# Altium PCB PCB1.PcbDoc
Units mil, origin at the board's own origin, x right, y up, seen from the top; angles counter-clockwise.
Board outline 2362.2 x 1574.8 mil, 2 copper layers (Top Layer, Bottom Layer); 33 components, 23 nets, 119 pads, 10 vias.
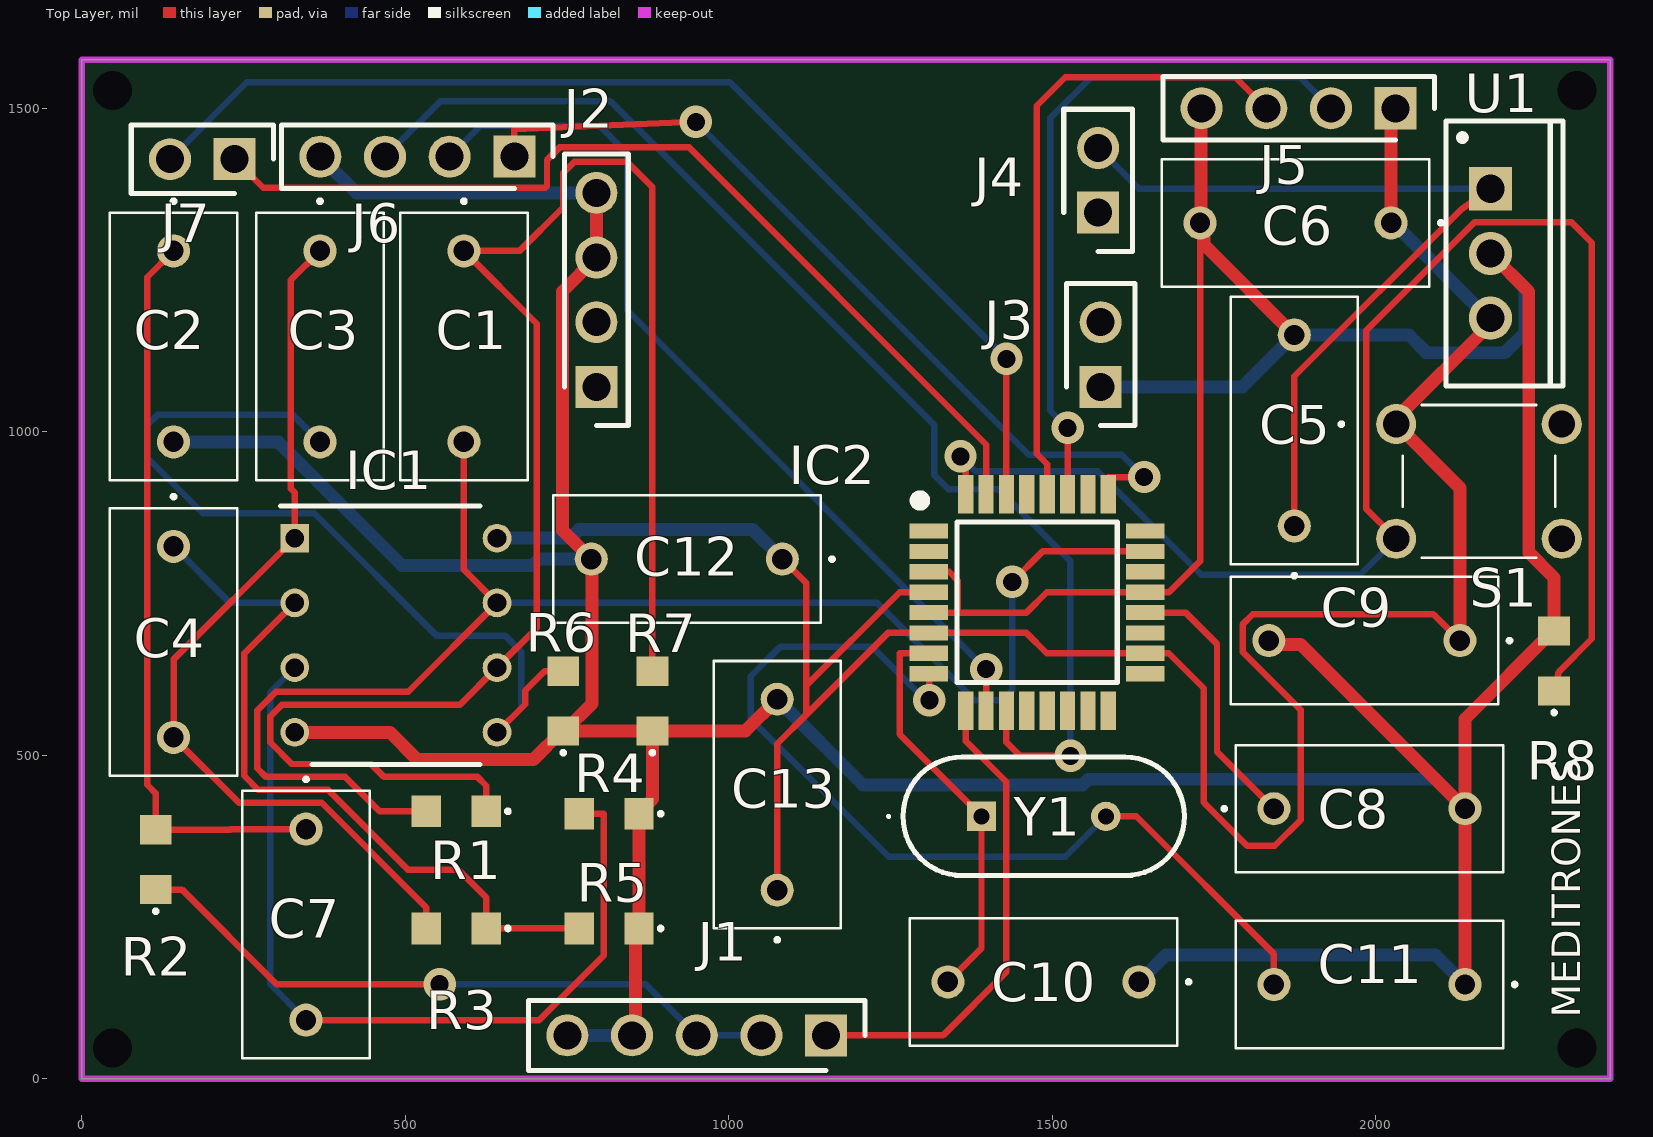
[diagram p0: Top Layer view]
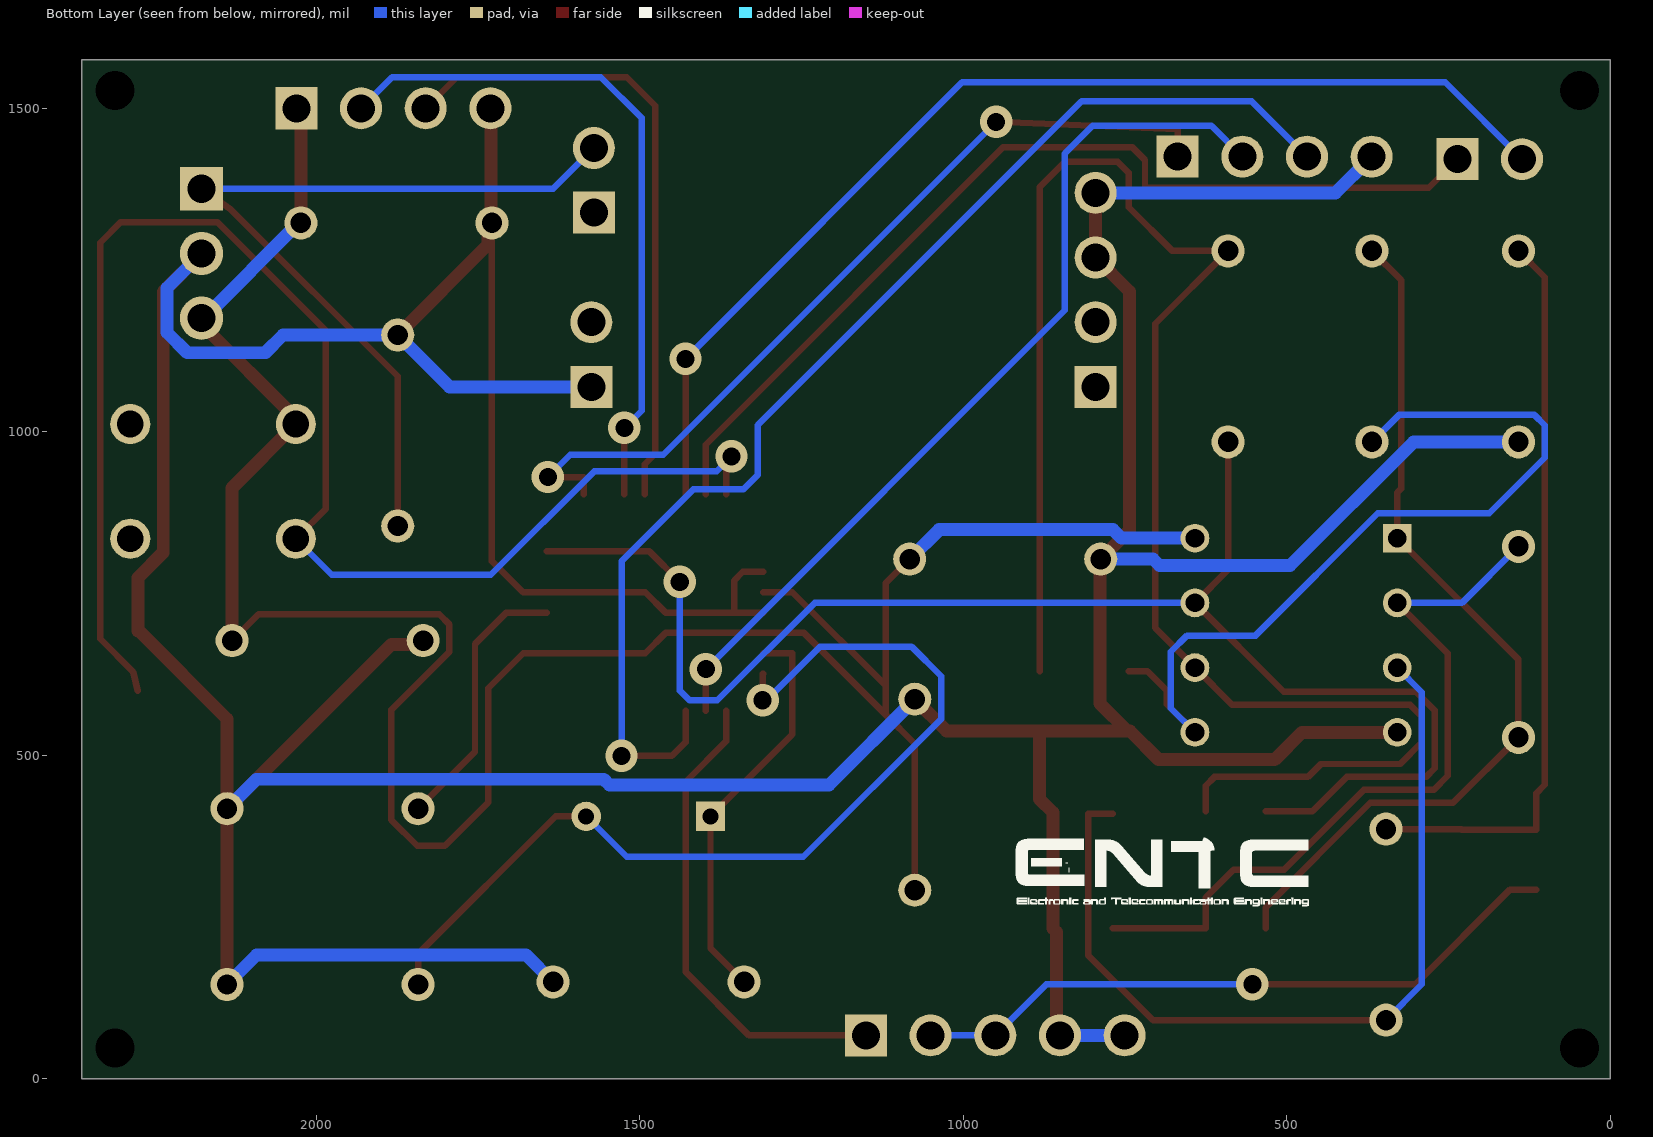
[diagram p1: Bottom Layer view, seen from below]
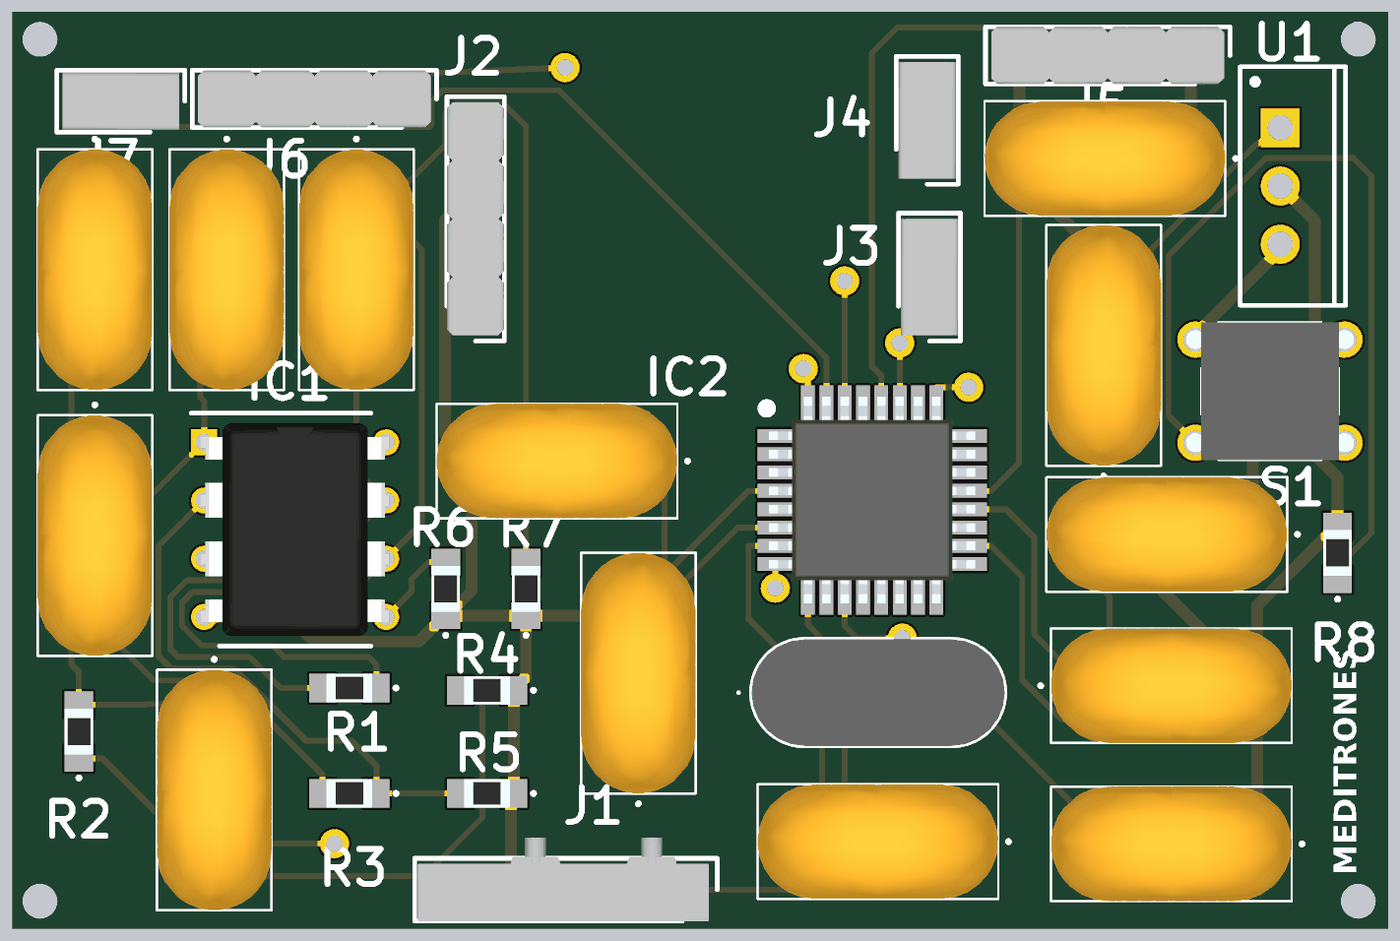
[diagram p2: 3D render of the assembled board from above, using the file's embedded part models]

## Layer stack, top to bottom
Top Solder: solder mask 0.4, Solder Resist, Dk 3.5
Top Layer: signal copper 1.4
Dielectric 1: dielectric 12.6, FR-4, Dk 4.8
Bottom Layer: signal copper 1.4
Bottom Solder: solder mask 0.4, Solder Resist, Dk 3.5

## Board outline
0,0 0,1574.8 2362.2,1574.8 2362.2,0

## Design rules (kind name [scope] priority, off if disabled: settings)
Clearance Clearance_1 [OnMid vs OnMid] p1: gap=10 ignorepadtopadclearanceinfootprint=TRUE sourcerule=37 cellrowname=All cellrowtype=0 cellcolname=All cellcoltype=0 innerlayers=TRUE
Clearance Clearance_2 [(ExistsOnLayer('Top Layer') Or ExistsOnLayer('Bottom Layer')) vs (ExistsOnLayer('Top Layer') Or ExistsOnLayer('Bottom Layer'))] p2: gap=10 ignorepadtopadclearanceinfootprint=TRUE sourcerule=37 cellrowname=All cellrowtype=0 cellcolname=All cellcoltype=0 outerlayers=TRUE
Clearance [All] p3: gap=10 ignorepadtopadclearanceinfootprint=TRUE ismatrix=TRUE
PolygonConnect [All] p1: connectstyle=Relief reliefconductorwidth=10 reliefentries=4 polygonreliefangle="90 Angle" airgapwidth=10
RoutingVias [All] p1: holewidth=28 width=50 viastyle="Through Hole" minholewidth=28 minwidth=50 maxholewidth=28 maxwidth=50
SolderMaskExpansion [All] p1: expansion=4 istentingtop=FALSE
Width MaxMinWidth_5 [All] p1: maxlimit=20 minlimit=10 preferedwidth=20 minimp=50.000000 maximp=50.000000 favimp=50.000000
Width [All] p2: maxlimit=10 minlimit=10 preferedwidth=10
30 further rules are at their usual default settings.

## Components (designator, comment, footprint, x,y, rotation, side; value= is the part's Value field where it differs from the comment)
C1 "0.1mF Cap" VY2332M41Y5US63V7 590.55,1279.53 r270 top
C2 "100nF Cap" VY2332M41Y5US63V7 141.73,1279.53 r270 top
C3 "1mF Cap" VY2332M41Y5US63V7 368.11,1279.53 r270 top
C4 "0.1mF Cap" VY2332M41Y5US63V7 141.73,822.83 r270 top
C5 "0.22mF Cap" VY2332M41Y5US63V7 1874.02,854.33 r90 top
C6 "0.1mF Cap" VY2332M41Y5US63V7 2023.62,1322.83 r180 top
C7 "1mF Cap" VY2332M41Y5US63V7 346.46,385.83 r270 top
C8 "100nF Cap" VY2332M41Y5US63V7 1842.52,417.32 r0 top
C9 "100nF Cap" VY2332M41Y5US63V7 2129.92,677.17 r180 top
C10 "22PF Cap" VY2332M41Y5US63V7 1633.86,149.61 r180 top
C11 "22PF Cap" VY2332M41Y5US63V7 2137.8,145.67 r180 top
C12 "10mF Cap" VY2332M41Y5US63V7 1082.68,803.15 r180 top
C13 "10mF Cap" VY2332M41Y5US63V7 1074.8,291.34 r90 top
IC1 "LM358PE4 OpAmp" DIP794W53P254L959H508Q8N 485.43,685.43 r0 top
IC2 "ATMEGA328P-AU" QFP80P900X900X120-32N 1476.38,736.22 r0 top
J1 "5 male headers" HDRV5W63P0X254_1X5_1270X254X970P 1150.39,66.93 r180 top
J2 "4 male headers" HDRV4W63P0X254_1X4_1016X250X950P 795.28,1069.29 r90 top
J3 "2 male headers" HDRV2W63P0X254_1X2_508X250X970P 1574.8,1069.29 r90 top
J4 "2 male headers" HDRV2W63P0X254_1X2_508X250X970P 1570.87,1338.58 r90 top
J5 "4 male headers" HDRV4W63P0X254_1X4_1016X250X950P 2030.71,1500 r180 top
J6 "4 male headers" HDRV4W63P0X254_1X4_1016X250X950P 668.5,1425.2 r180 top
J7 "2 male headers" HDRV2W63P0X254_1X2_508X250X970P 236.22,1421.26 r180 top
R1 "680k s R" ERJUP6 578.74,413.39 r180 top
R2 "1k s R" ERJUP6 114.17,338.58 r90 top
R3 "680k s R" ERJUP6 578.74,232.28 r180 top
R4 "68k s R" ERJUP6 814.96,409.45 r180 top
R5 "6.8k s R" ERJUP6 814.96,232.28 r180 top
R6 "68k s R" ERJUP6 744.09,583.66 r90 top
R7 "6.8k s R" ERJUP6 881.89,583.66 r90 top
R8 "10k s R" ERJUP6 2275.59,645.67 r90 top
S1 "MJTP1230A" MJTP1230A 2031.49,1011.81 r0 top
U1 "L7805CV" TO220 2177.17,1275.59 r270 top
Y1 "Ocillator" XT9S20ANA8M 1390.55,405.51 r0 top

## Footprints (in the part's own frame and the unit in brackets; to place one, negate y for a bottom-side part, rotate by r counter-clockwise, add the part's x,y. Pads: shape width x height; smd on the part's side, far side on the other; paste and mask are expansions set on the pad)
DIP794W53P254L959H508Q8N [mm]
  rect 1.13x1.13 hole 0.73: 1(-3.97,3.81)
  round 1.13 hole 0.73: 2(-3.97,1.27) 3(-3.97,-1.27) 4(-3.97,-3.81) 5(3.97,-3.81) 6(3.97,-1.27) 7(3.97,1.27) 8(3.97,3.81)
  silkscreen extent -4.53,-5.08 3.3,5.08, body extent -4.1,-4.64 4.1,4.64, height 4.21
ERJUP6 [mm]
  rect 1.15x1.25 smd: 1(-1.175,0) 2(1.175,0)
  silkscreen extent -2.07,-0.05 -1.98,0.05, body extent -1,-0.63 1,0.63, height 0.6
HDRV2W63P0X254_1X2_508X250X970P [mm]
  rect 1.65x1.65 hole 1.1: 1(0,0)
  round 1.65 hole 1.1: 2(2.54,0)
  silkscreen extent -1.52,-1.35 4.06,1.35, body extent -1.27,-1.25 3.81,1.25, height 9.5
HDRV4W63P0X254_1X4_1016X250X950P [mm]
  rect 1.65x1.65 hole 1.1: 1(0,0)
  round 1.65 hole 1.1: 2(2.54,0) 3(5.08,0) 4(7.62,0)
  silkscreen extent -1.52,-1.25 9.14,1.25, body extent -1.27,-1.25 8.89,1.25, height 9.5
HDRV5W63P0X254_1X5_1270X254X970P [mm]
  rect 1.65x1.65 hole 1.1: 1(0,0)
  round 1.65 hole 1.1: 2(2.54,0) 3(5.08,0) 4(7.62,0) 5(10.16,0)
  silkscreen extent -1.52,-1.37 11.68,1.37, body extent -1.16,-2.28 11.54,1.37, height 9.5
MJTP1230A [mm]
  round 1.575 hole 1.05: 1(0,0) 2(0,-4.5) 3(6.5,-4.5) 4(6.5,0)
  silkscreen extent -2.2,-5.25 6.25,0.75, body extent -0.43,-5.25 6.93,0.75, height 5.1
QFP80P900X900X120-32N [mm]
  rect 1.5x0.6 smd: 1(-4.25,2.8) 2(-4.25,2) 3(-4.25,1.2) 4(-4.25,0.4) 5(-4.25,-0.4) 6(-4.25,-1.2) 7(-4.25,-2) 8(-4.25,-2.8) 17(4.25,-2.8) 18(4.25,-2) 19(4.25,-1.2) 20(4.25,-0.4) 21(4.25,0.4) 22(4.25,1.2) 23(4.25,2) 24(4.25,2.8)
  rect 0.6x1.5 smd: 9(-2.8,-4.25) 10(-2,-4.25) 11(-1.2,-4.25) 12(-0.4,-4.25) 13(0.4,-4.25) 14(1.2,-4.25) 15(2,-4.25) 16(2.8,-4.25) 25(2.8,4.25) 26(2,4.25) 27(1.2,4.25) 28(0.4,4.25) 29(-0.4,4.25) 30(-1.2,4.25) 31(-2,4.25) 32(-2.8,4.25)
  silkscreen extent -4.8,-3.15 3.15,4.2, body extent -4.5,-4.5 4.5,4.5, height 1.2
TO220 [mm] "TO, Thru-Hole, Vertical, Heatsink Mounted; 3 In-Line Leads; Pitch 2.54 mm"
  rect 1.7x1.7 hole 1.1: 1(-2.54,0)
  round 1.7 hole 1.1: 2(0,0) 3(2.54,0)
  silkscreen extent -5.2,-1.75 5.2,2.85, body extent -5.25,-1.8 5.25,2.9, height 19.7
VY2332M41Y5US63V7 [mm]
  round 1.3 hole 0.8: 1(0,0) 2(7.5,0)
  silkscreen extent -2,-2.5 9,2.5, body extent -1.46,-2.5 8.96,2.5, height 14.13
XT9S20ANA8M [mm]
  rect 1.155x1.155 hole 0.63: 1(0,0)
  round 1.155 hole 0.63: 2(4.88,0)
  silkscreen extent -3.7,-2.33 7.96,2.33, body extent -3.09,-2.32 7.97,2.32, height 3.6

## Part data
C1 C2 C3 C4 C5 C6 C7 C8 C9 C10 C11 C12 C13: "Capacitor", Manufacturer_Name=Vishay, Manufacturer_Part_Number=VY2332M41Y5US63V7, Mouser Part Number=72-VY2332M41Y5US63V7, Datasheet Link=https://datasheet.datasheetarchive.com/originals/dk/DKDS-39/9814.pdf, Height=13.5mm, Mouser Price/Stock=https://www.mouser.co.uk/ProductDetail/Vishay-BC-Components/VY2332M41Y5US63V7?qs=YhDfSRCt1jTfstvwiD5kGA%3D%3D
IC1: "Integrated Circuit", Arrow Part Number=LM358PE4, Manufacturer_Name="Texas Instruments", Mouser Part Number=595-LM358PE4, Arrow Price/Stock=https://www.arrow.com/en/products/lm358pe4/texas-instruments?region=nac, Datasheet Link=http://www.ti.com/lit/ds/symlink/lm358.pdf, Height=5.08mm, Manufacturer_Part_Number=LM358PE4, Mouser Price/Stock=https://www.mouser.co.uk/ProductDetail/Texas-Instruments/LM358PE4?qs=VBduBm9rCJTWtuRHSrRjAg%3D%3D
IC2: "Integrated Circuit", Manufacturer_Name=Microchip, Mouser Part Number=556-ATMEGA328P-AU, Arrow Part Number=ATMEGA328P-AU, Arrow Price/Stock=https://www.arrow.com/en/products/atmega328p-au/microchip-technology?region=europe, Datasheet Link=https://componentsearchengine.com/Datasheets/2/ATMEGA328P-AU.pdf, Height=1.2mm, Manufacturer_Part_Number=ATMEGA328P-AU, Mouser Price/Stock=https://www.mouser.co.uk/ProductDetail/Microchip-Technology/ATMEGA328P-AU?qs=K8BHR703ZXiCmmgp6%2FGNmQ%3D%3D
J1: "Connector", Arrow Part Number=825433-5, Manufacturer_Name="TE Connectivity", Mouser Part Number=571-825433-5, Arrow Price/Stock=https://www.arrow.com/en/products/825433-5/te-connectivity?region=europe, Datasheet Link=https://www.te.com/commerce/DocumentDelivery/DDEController?Action=srchrtrv&DocNm=825433&DocType=Customer+Drawing&DocLang=English&DocFormat=pdf&PartCntxt=825433-5, Height=9.7mm, Manufacturer_Part_Number=825433-5, Mouser Price/Stock=https://www.mouser.co.uk/ProductDetail/TE-Connectivity/825433-5?qs=Yxch5oR%2FTsPo6cKMIYPWXA%3D%3D
J2 J5 J6: "Connector", Arrow Part Number=826629-4, Manufacturer_Name="TE Connectivity", Mouser Part Number=571-826629-4, Arrow Price/Stock=https://www.arrow.com/en/products/826629-4/te-connectivity?region=europe, Datasheet Link=https://componentsearchengine.com/Datasheets/2/826629-4.pdf, Height=9.5mm, Manufacturer_Part_Number=826629-4, Mouser Price/Stock=https://www.mouser.co.uk/ProductDetail/TE-Connectivity/826629-4?qs=FazuUmncXom81cYQ0o6zwQ%3D%3D
J3 J4 J7: "Connector", Arrow Part Number=826926-2, Manufacturer_Name="TE Connectivity", Mouser Part Number=571-826926-2, Arrow Price/Stock=https://www.arrow.com/en/products/826926-2/te-connectivity?region=europe, Datasheet Link=http://www.te.com/commerce/DocumentDelivery/DDEController?Action=showdoc&DocId=Customer+Drawing%7F826629%7FAB%7Fpdf%7FEnglish%7FENG_CD_826629_AB.pdf%7F826926-2, Height=9.7mm, Manufacturer_Part_Number=826926-2, Mouser Price/Stock=https://www.mouser.co.uk/ProductDetail/TE-Connectivity/826926-2?qs=wMzmFFBcbXSakt8A2XXzBg%3D%3D
R1 R2 R3 R4 R5 R6 R7 R8: "Resistor", Manufacturer_Name=Panasonic, Manufacturer_Part_Number=ERJ-UP6F5760V, Mouser Part Number=667-ERJ-UP6F5760V, Datasheet Link=https://industrial.panasonic.com/cdbs/www-data/pdf/RDP0000/AOA0000C337.pdf, Height=0.7mm, Mouser Price/Stock=https://www.mouser.co.uk/ProductDetail/Panasonic/ERJ-UP6F5760V?qs=dbcCsuKDzFWkTsFWGgr5lA%3D%3D
S1: "Switch", Manufacturer_Name=Apem, Mouser Part Number=642-MJTP1230A, Datasheet Link=https://componentsearchengine.com/Datasheets/2/MJTP1230A.pdf, Height=5mm, Manufacturer_Part_Number=MJTP1230A, Mouser Price/Stock=https://www.mouser.co.uk/ProductDetail/Apem/MJTP1230A?qs=Uv2m1HzDAyrCq22V7auhWA%3D%3D
U1: library part CMP-0244-00483-1, "Positive Voltage Regulator, 5V, 3-Pin TO-220", ComponentLink1Description="Manufacturer URL", ComponentLink1URL=http://www.st.com, ComponentLink2Description=Datasheet, ComponentLink2URL=http://www.st.com/internet/com/TECHNICAL_RESOURCES/TECHNICAL_LITERATURE/DATASHEET/CD00000444.pdf, ComponentLink3Description="Package Specification", ComponentLink3URL=http://www.st.com/internet/com/TECHNICAL_RESOURCES/TECHNICAL_LITERATURE/PACKAGE_INFORMATION/CD00004649.pdf, DatasheetVersion=16/11/2011, PackageDescription="TO, Thru-Hole, Vertical, Heatsink Mounted; 3 In-Line Leads; Pitch 2.54 mm", PackageReference=TO220, PackageVersion=ver3.0
Y1: "Crystal or Oscillator", Arrow Part Number=XT9S20ANA8M, Manufacturer_Name=Vishay, Mouser Part Number=73-XT49S800-20, Arrow Price/Stock=https://www.arrow.com/en/products/xt9s20ana8m/vishay?region=nac, Datasheet Link=https://www.vishay.com/docs/35014/xt49s.pdf, Height=3.5mm, Manufacturer_Part_Number=XT9S20ANA8M, Mouser Price/Stock=https://www.mouser.co.uk/ProductDetail/Vishay-Dale/XT9S20ANA8M?qs=oFi4%2FQsgZXYxL7wCZW5FzA%3D%3D

## Free pads (board coordinates)
  round 0 hole 60 unplated: ""(47.24,47.24) ""(47.24,1527.56) ""(47.24,1527.56) ""(2311.02,47.24) ""(2311.02,1527.56)

## Via types
v1: diameter 50, hole 28, Top Layer to Bottom Layer, 10 vias

## Nets (pads, with @x,y where several pads share a name; then routed paths per layer and width w, separated by ;. In a path a pad name is that pad's centre, name@x,y a point inside that pad or via, vN(x,y) a via of type N, cw(c..) or ccw(c..) an arc to the next point about the centre after c; other vN are vias at no path point)
+5V: C6.1 C9.1 C12.1 C13.1 IC1.8 IC2.4 IC2.6 IC2.18 J5.1 S1.1 U1.3 | length 4028.4
  Top Layer w10: C13.1 1074.8,517.78 1120,562.98 ; C12.1 1120,765.83 1120,607.97 ; IC2.4 1264,751.97 1120,607.97 ; C9.1 2089.09,718 1810,718 1794.05,702.05 1794.05,660 1884,570.05 1884,400 1844,360 1801,360 1734,427 1734,603.48 1680,657.48 IC2.18 1491.5,657.48 1460,688.98 IC2.6 1246,688.98 1120,562.98 ; 1120,562.98 1120,607.97
  Top Layer w20: C6.1 2023.62,1492.91 J5.1 ; C9.1 2129.92,913.39 S1.1 2031.5,1020.87 2177.17,1166.54 U1.3
  Bottom Layer w10: C6.1 C6.1@2025.79,1325
  Bottom Layer w20: IC1.8 755.21,835.43 768.52,848.74 1037.09,848.74 C12.1 ; C6.1 2026.77,1322.83 2174.02,1175.59 U1.3
-V1: C4.1 IC1.2 R3.1 R5.2 | length 1166.6
  Top Layer w10: IC1.2 251,657.3 251,468.21 272.79,446.42 380.63,446.42 504.05,323 582,323 625,280 R3.1 696,232.28 R5.2
  Bottom Layer w10: C4.1 229.13,735.43 IC1.2
-V2: C1.1 IC1.6 R1.1 R7.2 | length 2683
  Top Layer w10: R1.1 625,453 611.58,466.42 467.05,466.42 447.05,486.42 324.58,486.42 291,520 291,560 309.19,578.19 584.49,578.19 IC1.6 703,696.7 703,1167.08 C1.1 676.53,1279.53 744,1347 744,1400 761,1417 843,1417 881.89,1378.11 R7.2
D2: IC2.32 R8.1 S1.2 | length 2321.6
  Top Layer w10: v1(1358,962) 1366.14,953.86 IC2.32 ; S1.2 1985,881.14 1985,1156.3 2152.76,1324.06 2302,1324.06 2334,1292.06 2334,680 2282.59,628.59 R8.1
  Bottom Layer w10: v1(1358,962) 1381,939 1570,939 1730,779 1975.85,779 S1.2
D5: IC2.9 J1.1 | length 749.2
  Top Layer w10: J1.1 1331,66.93 1429,164.93 1429,459 1366.14,521.86 IC2.9
D6: IC2.10 J6.2 | length 1402.9
  Top Layer w10: IC2.10 v1(1397.64,633)
  Bottom Layer w10: J6.2 616.31,1473 800,1473 843,1430 843,1187.64 v1(1397.64,633)
D7: IC2.11 J6.3 | length 1892.2
  Top Layer w10: IC2.11 1429.13,520 1450.13,499 v1(1528,499)
  Bottom Layer w10: J6.3 554.31,1511 817,1511 1317.64,1010.36 1317.64,933.13 1340,910.77 1417.23,910.77 1528,800 v1(1528,499)
Ground: C2.2 C5.2 C6.2 C8.2 C9.2 C10.1 C11.1 C12.2 C13.2 IC1.4 IC2.3 IC2.5 IC2.21 J1.4 J1.5 J2.3 J2.4 J3.1 J5.4 J6.4 R4.1 R5.1 R6.1 R7.1 R8.2 U1.2 | length 9097.5
  Top Layer w10: IC2.5 1354,720.47 ; IC2.3 1340.54,783.46 1354,770 1354,720.47 ; 1728.35,1295.27 1728.35,800 1680.31,751.97 IC2.21 1491.5,751.97 1460,720.47 1354,720.47
  Top Layer w20: IC1.4 476.37,535.43 518.62,493.19 697.91,493.19 742.13,537.4 R6.1 R6.1@746.06,537.4 ; J2.4 J2.3 742.8,1216.81 742.8,847.76 C12.2 788.7,801.85 788.7,580.04 R6.1@746.06,537.4 ; J1.4 855.81,72.34 855.81,226.87 R5.1 R4.1 861.22,411.42 881.89,432.09 R7.1 ; C13.2 1025.59,537.4 R7.1 ; J5.4 1729.53,1498.82 1729.53,1324.01 C6.2 1734.31,1316.87 1734.31,1289.31 C5.2 ; C9.2 1840.61,671.2 1883.92,671.2 C8.2 ; C11.1 C8.2 ; U1.2 2236.4,1216.36 2236.4,813.52 2275.59,774.33 R8.2 2273.62,691.93 2137.8,556.1 C8.2 ; R6.1@746.06,537.4 R7.1
  Bottom Layer w20: C2.2 303.64,984.25 494.7,793.19 696.62,793.19 706.58,803.15 C12.2 ; J6.4 368.5,1423.62 366.14,1421.26 372.44,1421.26 424.41,1369.29 J2.4 ; J1.5 J1.4 ; C13.2 1207.42,454 1546.64,454 1555.55,462.91 2092.21,462.91 C8.2 ; J3.1 1793.7,1069.29 C5.2 2051.18,1149.6 2078.66,1122.13 2199.31,1122.13 2230.63,1153.44 2230.63,1222.13 U1.2 ; C10.1 1675.51,191.26 2092.21,191.26 C11.1
NetC2_1: C2.1 C7.1 R2.2 | length 1149.7
  Top Layer w10: C2.1 101,1238.79 101,454.17 114.17,441 R2.2 229,384.84 229.98,385.83 C7.1
NetC3_1: C3.1 C4.2 IC1.1 R3.2 | length 1382.8
  Top Layer w10: C3.1 323,1234.42 323,912.13 329.13,906 IC1.1 141.73,648.03 C4.2 242.87,426.42 370.63,426.42 532.48,264.57 R3.2
NetC3_2: C3.2 IC1.5 R6.2 | length 1337.1
  Top Layer w10: IC1.5 685.3,579 685.3,600 715.22,629.92 R6.2
  Bottom Layer w10: C3.2 326.36,1026 117,1026 101,1010 101,960 187,874 359,874 548,685 654,685 679,660 679,572.7 IC1.5
NetC5_1: C5.1 J4.2 U1.1 | length 1283.9
  Top Layer w10: C5.1 1874.01,1085.76 2132.31,1344.06 U1.1
  Bottom Layer w10: J4.2 1633.86,1375.59 U1.1
NetC7_2: C7.2 IC1.3 R4.2 | length 1342.5
  Top Layer w10: C7.2 706.55,90.55 807,191 807,409.45 R4.2
  Bottom Layer w10: IC1.3 291,597.3 291,146.01 C7.2
NetC8_1: C8.1 IC2.20 | length 422
  Top Layer w10: IC2.20 1706,720.47 1754.53,671.94 1754.53,505.31 C8.1
NetC10_2: C10.2 IC2.7 Y1.1 | length 626.9
  Top Layer w10: IC2.7 1264,657.48 1264,532.06 Y1.1 1390.55,201.58 C10.2
NetC11_2: C11.2 IC2.8 Y1.2 | length 1495.2
  Top Layer w10: IC2.8 1310,625.98 v1(1310,585) ; Y1.2 1629.68,405.51 1842.52,192.67 C11.2
  Bottom Layer w10: v1(1310,585) 1304,585 1221,668 1080,668 1034,622 1034,556 1247,343 1520.17,343 Y1.2
NetIC2_25: IC2.25 J6.1 | length 1325.3
  Top Layer w10: J6.1 668.5,1467.5 v1(949,1479) ; IC2.25 1586.61,930 v1(1642,930)
  Bottom Layer w10: v1(949,1479) 1463.47,964.53 1607.47,964.53 v1(1642,930)
NetJ1_2: J1.2 J1.3 R2.1 | length 1029.6
  Top Layer w10: R2.1 154.68,292.32 301,146 v1(553,146)
  Bottom Layer w10: v1(553,146) 871.32,146 J1.3 J1.2
RX: IC2.31 J7.1 | length 1497
  Top Layer w10: J7.1 280.48,1377 716,1377 718.97,1379.97 718.97,1420 738.97,1440 938,1440 1398,980 1398,922 1397.64,922 IC2.31
SCL: IC2.27 J5.2 | length 1072.2
  Top Layer w10: IC2.27 v1(1523.62,1006)
  Bottom Layer w10: v1(1523.62,1006) 1497,1032.62 1497,1485 1560,1548 1882.71,1548 J5.2
SDA: IC2.28 J5.3 | length 1000
  Top Layer w10: IC2.28 1492.13,949.87 1476,966 1476,1504 1520,1548 1782.71,1548 J5.3
TX: IC2.30 J7.2 | length 1728.2
  Top Layer w10: IC2.30 v1(1429.13,1112.59)
  Bottom Layer w10: J7.2 254.96,1540 1001.73,1540 v1(1429.13,1112.59)
Vout: C1.2 IC1.7 IC2.23 R1.2 | length 2345.8
  Top Layer w10: R1.2 460.08,413.39 407.05,466.42 284.58,466.42 271,480 271,569.19 300,598.19 504.49,598.19 IC1.7 590.55,786.61 C1.2 ; v1(1438,768) 1484.96,814.96 IC2.23
  Bottom Layer w10: IC1.7 1229.57,735.43 1380,585 1423,585 1438,600 v1(1438,768)
pads on no net: IC2.1 IC2.2 IC2.12 IC2.13 IC2.14 IC2.15 IC2.16 IC2.17 IC2.19 IC2.22 IC2.24 IC2.26 IC2.29 J2.1 J2.2 J3.2 J4.1 S1.3 S1.4

## Keep-outs
Top Layer:
  the board outline again, w10

## Silkscreen, mask and mechanical layers (free items; w line width, h text height)
Top Overlay:
  text "MEDITRONES" at 2330.71,94.49 h75 r90
Bottom Overlay:
  drawing of 53 lines, arcs and shapes, not listed